# Altium PCB lononTV.PcbDoc
Units mm, origin at the board's own origin, x right, y up, seen from the top; angles counter-clockwise.
Board outline 59.36 x 60.2 mm, 2 copper layers (Top Layer, Bottom Layer); 61 components, 57 nets, 268 pads, 237 vias.
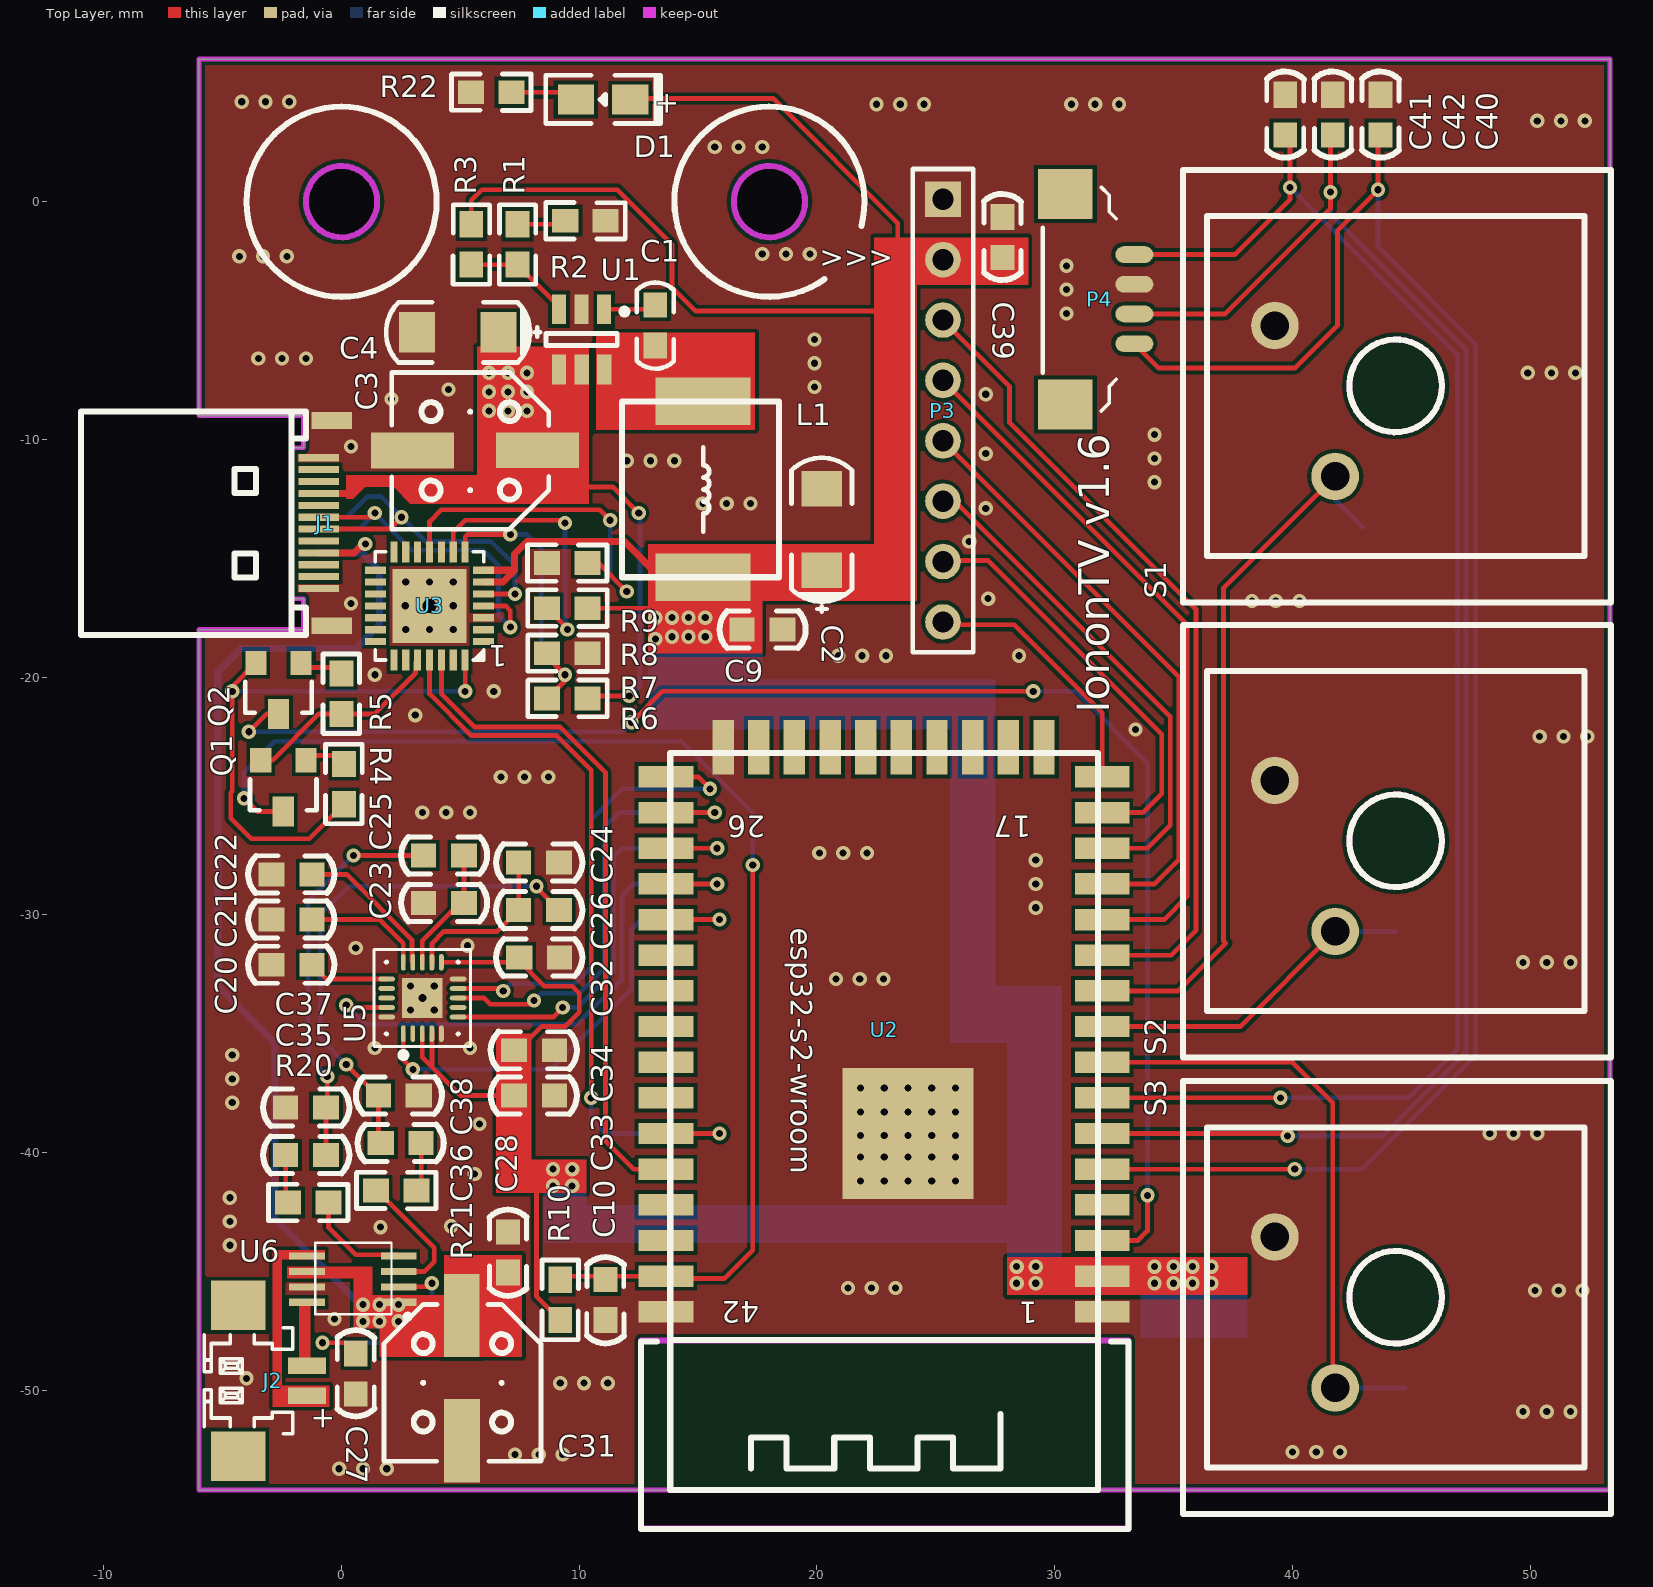
[diagram p0: Top Layer view]
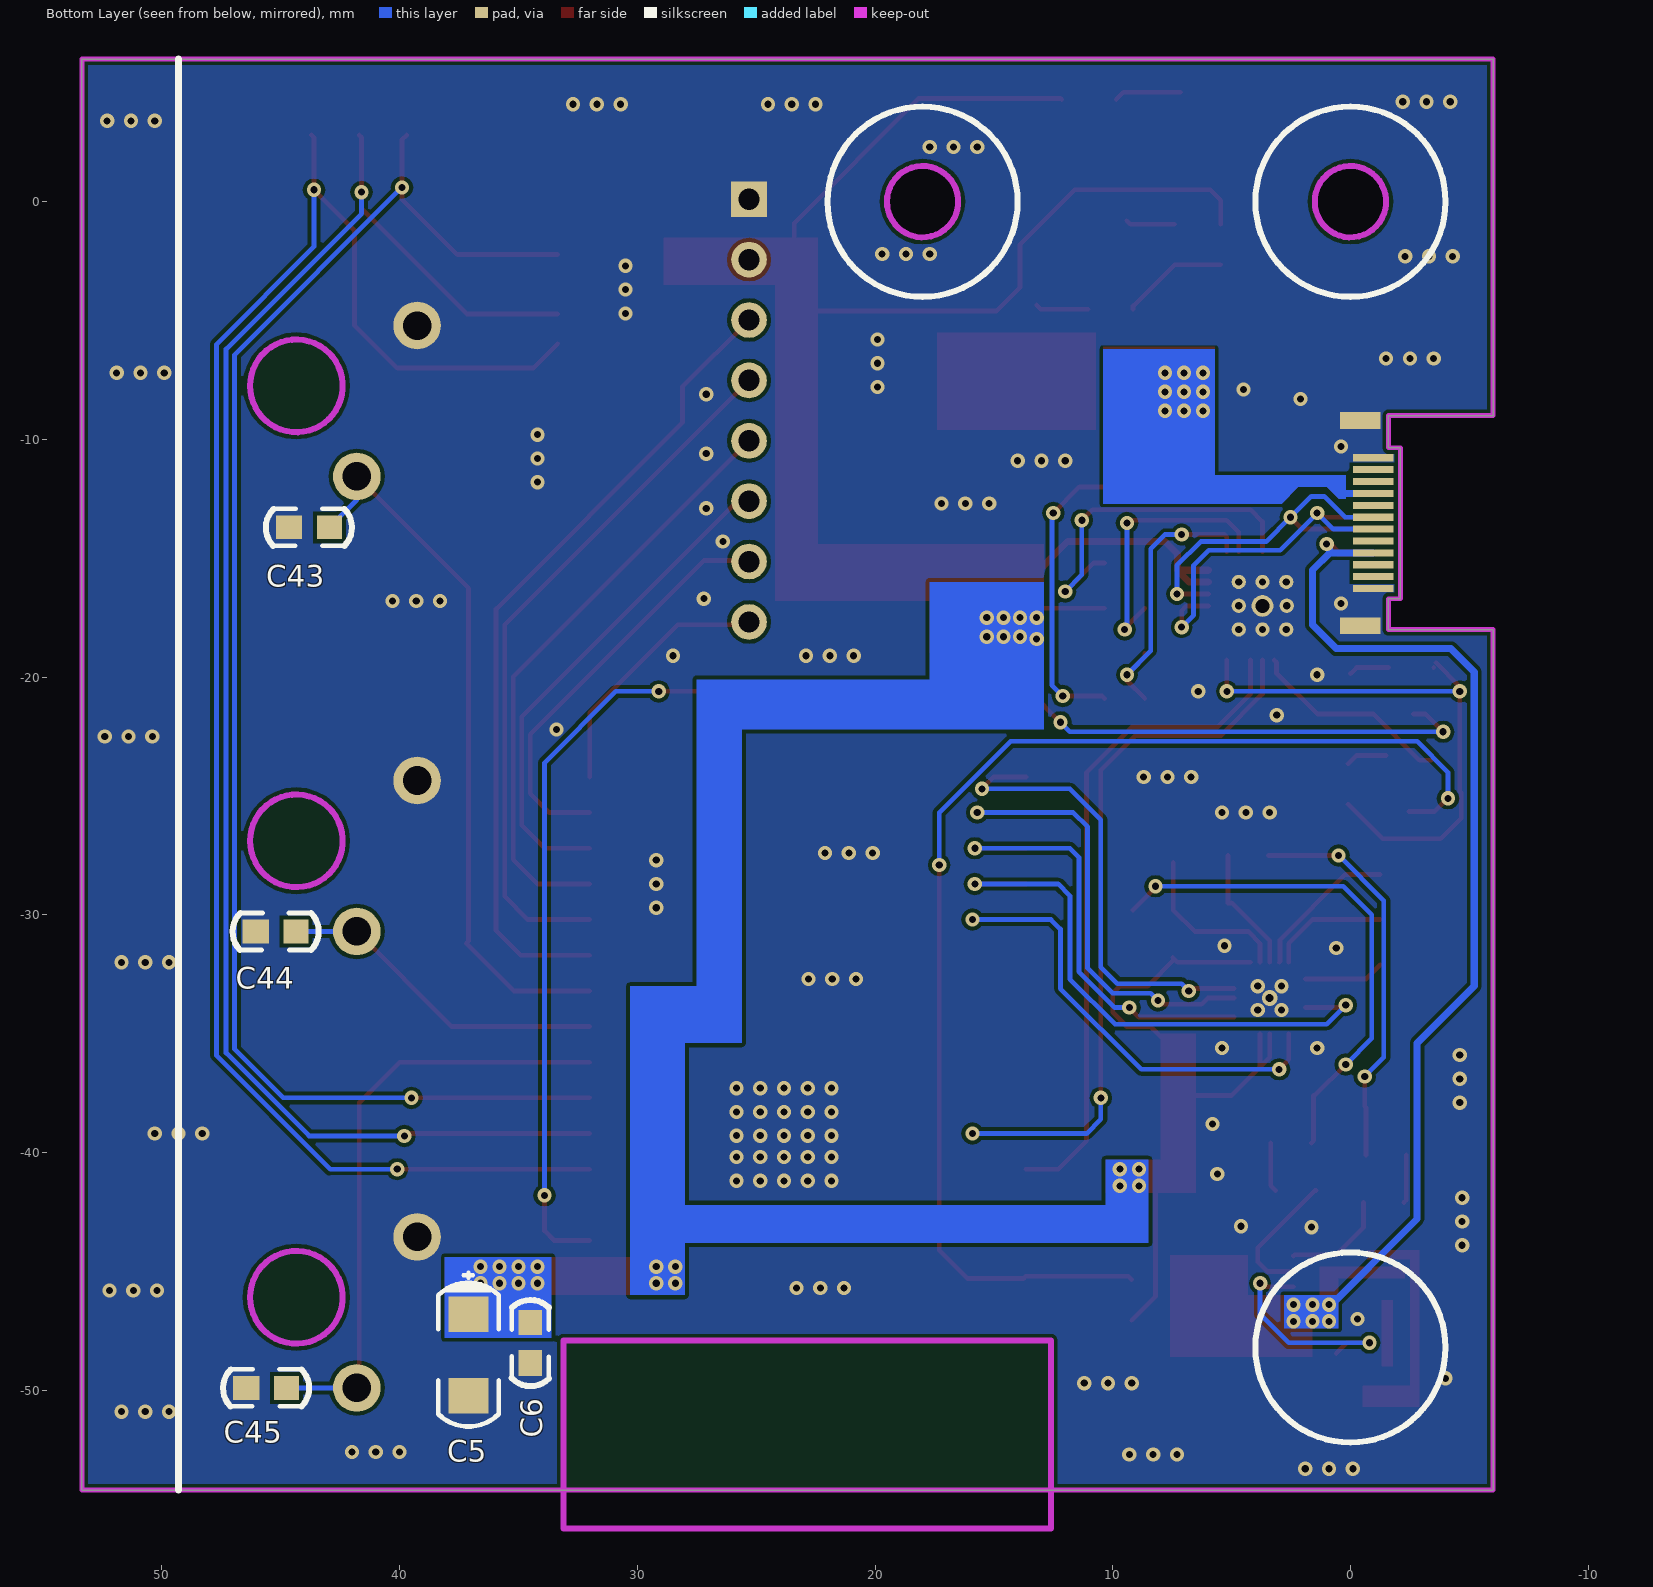
[diagram p1: Bottom Layer view, seen from below]

## Layer stack, top to bottom
Top Layer: signal copper 0.0356
Dielectric: dielectric 0.32, FR-4, Dk 4.8
Bottom Layer: signal copper 0.0356

## Board outline
-6,-35.6 -6,-18 -1.6,-18 -1.6,-16.7 -2.1,-16.7 -2.1,-10.35 -1.6,-10.35 -1.6,-9 -6,-9 -6,6 53.36,6 53.36,-54.2 -6,-54.2
cut-out: 16.5,0 ccw(c18,0) 18,-1.5 ccw(c18,0) 19.5,0 ccw(c18,0) 18,1.5 ccw(c18,0)
cut-out: 0,-1.5 cw(c0,0) -1.5,0 cw(c0,0) 0,1.5 cw(c0,0) 1.5,0 cw(c0,0)

## Design rules (kind name [scope] priority, off if disabled: settings)
Clearance [All] p1: gap=0.16
ComponentClearance [All] p1 off: gap=0.254 collisioncheckmode=3 verticalgap=0.254 showdistances=FALSE
PolygonConnect [All] p1: connectstyle=Direct reliefconductorwidth=0.254 reliefentries=4 polygonreliefangle="90 Angle"
RoutingVias [All] p1: holewidth=0.3 width=0.6 viastyle="Through Hole" minholewidth=0.3 minwidth=0.6 maxholewidth=0.3 maxwidth=0.6
SilkscreenOverComponentPads [All] p1: minsilkscreentomaskgap=0.254
SolderMaskExpansion [All] p1: expansion=0.102
Width [All] p1: maxlimit=0.3 minlimit=0.2 preferedwidth=0.2
26 further rules are at their usual default settings.

## Components (designator, comment, footprint, x,y, rotation, side; value= is the part's Value field where it differs from the comment)
C1 "100nF" 0603C 13.2,-5.2 r270 top
C2 "10uF" 1206-A 20.2,-15.5 r90 top
C3 "220uF" 铝电容6.6 5.6,-10.5 r0 top
C4 "10uF" 1206-A 6.6,-5.5 r180 top
C5 "10uF/16v" 1206-A 37.1,-46.8 r270 bottom
C6 "104" "C0603 - duplicate" 34.5,-48 r270 bottom
C9 "104" "C0603 - duplicate" 17.7,-18 r0 top
C10 "105" "C0603 - duplicate" 11.1,-46.2 r270 top
C20 "105" "C0603 - duplicate" -2.1,-32.1 r180 top
C21 "105" "C0603 - duplicate" -2.1,-30.2 r180 top
C22 "105" "C0603 - duplicate" -2.1,-28.3 r180 top
C23 "22p" "C0603 - duplicate" 4.3,-29.5 r0 top
C24 "22p" "C0603 - duplicate" 8.3,-27.8 r0 top
C25 "105" "C0603 - duplicate" 4.3,-27.5 r0 top
C26 "105" "C0603 - duplicate" 8.3,-29.8 r0 top
C27 "105" "C0603 - duplicate" 0.6,-49.3 r90 top
C28 "104" "C0603 - duplicate" 7,-44.2 r270 top
C31 "220uF" 铝电容6.6 5.1,-49.5 r90 top
C32 "105" "C0603 - duplicate" 8.328,-31.8 r180 top
C33 "104" "C0603 - duplicate" 8.1,-37.6 r180 top
C34 "104" "C0603 - duplicate" 8.1,-35.7 r180 top
C35 "104" "C0603 - duplicate" -1.5,-40.1 r0 top
C36 "104" "C0603 - duplicate" 2.5,-39.6 r180 top
C37 "22p" "C0603 - duplicate" -1.5,-38.1 r0 top
C38 "22p" "C0603 - duplicate" 2.4,-37.6 r0 top
C39 "104" "C0603 - duplicate" 27.8,-1.5 r90 top
C40 "104" "C0603 - duplicate" 43.7,3.65 r90 top
C41 "104" "C0603 - duplicate" 39.7,3.65 r90 top
C42 "104" "C0603 - duplicate" 41.7,3.65 r90 top
C43 "104" "C0603 - duplicate" 43.8,-13.7 r0 bottom
C44 "104" "C0603 - duplicate" 45.2,-30.7 r0 bottom
C45 "104" "C0603 - duplicate" 45.6,-49.9 r0 bottom
D1 "" d0805 11,4.3 r180 top
J1 "" TYPE-C夹板C2856664 -0.4,-9.2 r270 top
J2 "SPK" "MX1.25-2P 立" -2.9,-49.6 r90 top
L1 "6.8uH" 电感7.4*6.6 18.4,-8.4 r270 top
P3 "Header 8" HDR1X8 25.3,0.1 r270 top
P4 "Header 4" "MX1.25-4P 立" 30.2,-12.4 r90 top
Q1 "8050" 3904 -1.5,-23.5 r180 top
Q2 "8050" 3904 -1.7,-19.4 r180 top
R1 "10k" 0603R 7.4,-1.799 r270 top
R2 "1.3k" 0603R 10.26,-0.8 r180 top
R3 "51k" 0603R 5.46,-1.8 r270 top
R4 "10K" R0603 0.1,-24.5 r90 top
R5 "10K" R0603 -0.006,-20.701 r90 top
R6 "22.1K" R0603 9.5,-20.9 r0 top
R7 "47.5K" R0603 9.5,-19 r0 top
R8 "2K" R0603 9.5,-17.1 r0 top
R9 "10K" R0603 9.5,-15.2 r180 top
R10 "10K" 0603R 9.2,-46.2 r90 top
R20 "150K" 0603R -1.4,-42.1 r180 top
R21 "150K" 0603R 2.3,-41.6 r0 top
R22 "330R" 0603R 6.3,4.6 r0 top
S1 "6X6X6mm" C400237_KT红轴 36.4,-14.86 r90 top
S2 "6X6X6mm" C400237_KT红轴 36.4,-34 r90 top
S3 "6X6X6mm" C400237_KT红轴 36.4,-53.2 r90 top
U1 "STI3470" SOT-23-6L 10.1,-5.8 r270 top
U2 "esp32-s2-wroom" ESP32-S2-WROOM 31.9,-46.7 r180 top
U3 "CP2102N" "QFN 28-pin-05P" 3.7,-17 r90 top
U5 "ES8311" QFN20_3*3 2.6,-35 r90 top
U6 "NS4150" MSOP8 2.4,-46.3 r180 top

## Footprints (in the part's own frame and the unit in brackets; to place one, negate y for a bottom-side part, rotate by r counter-clockwise, add the part's x,y. Pads: shape width x height; smd on the part's side, far side on the other; paste and mask are expansions set on the pad)
0603C [mm]
  rect 1.05x1 smd: 1(-0.85,0)
  rect 1.1x1 smd: 2(0.85,0)
  silkscreen extent -1.8,-0.78 1.83,0.78
0603R [mm]
  rect 1.1x1 smd: 1(-0.85,0) 2(0.85,0)
  silkscreen extent -1.67,-0.77 1.67,0.77
1206-A [mm]
  rect 1.5x1.7 smd: 1(0,0) 2(3.429,0)
  silkscreen extent -1.76,-1.27 4.72,1.27
3904 [mm]
  rect 0.889x1.016 smd: 1(0,0) 3(1.9,0)
  rect 0.9x1.27 smd: 2(0.95,2.15)
  silkscreen extent -0.45,0.8 2.35,2.1
"C0603 - duplicate" [mm]
  rect 1.05x1 smd: 1(-0.85,0)
  rect 1.1x1 smd: 2(0.85,0)
  silkscreen extent -1.8,-0.78 1.83,0.78
C400237_KT红轴 [mm]
  round 2 hole 1.2: 1(3.3,-5.4) 2(9.65,-2.86)
  Keep-Out Layer circle w0.254: c7.11,-7.94 r1.95
  silkscreen extent -2,-17 16.2,1
d0805 [mil]
  rect 60x50 smd: A(-45,0) K(45,0)
  silkscreen extent -95,-40 95,40
ESP32-S2-WROOM [mm]
  rect 2.3x0.9 smd: 1(-0.1,0) 2(-0.1,-1.5) 3(-0.1,-3) 4(-0.1,-4.5) 5(-0.1,-6) 6(-0.1,-7.5) 7(-0.1,-9) 8(-0.1,-10.5) 9(-0.1,-12) 10(-0.1,-13.5) 11(-0.1,-15) 12(-0.1,-16.5) 13(-0.1,-18) 14(-0.1,-19.5) 15(-0.1,-21) 16(-0.1,-22.5) 27(18.25,-22.5) 28(18.25,-21) 29(18.25,-19.5) 30(18.25,-18) 31(18.25,-16.5) 32(18.25,-15) 33(18.25,-13.5) 34(18.25,-12) 35(18.25,-10.5) 36(18.25,-9) 37(18.25,-7.5) 38(18.25,-6) 39(18.25,-4.5) 40(18.25,-3) 41(18.25,-1.5) 42(18.25,0)
  rect 0.9x2.3 smd: 17(2.35,-23.75) 18(3.85,-23.75) 19(5.35,-23.75) 20(6.85,-23.75) 21(8.35,-23.75) 22(9.85,-23.75) 23(11.35,-23.75) 24(12.85,-23.75) 25(14.35,-23.75) 26(15.85,-23.75)
  rect 5.5x5.5 smd: 43(8.073,-7.5)
  Keep-Out Layer lines w0.254: 19.3,9.11 19.3,1.21 -1.2,1.21 -1.2,9.11 19.3,9.11
  silkscreen extent -1.2,-23.51 19.3,9.14
HDR1X8 [mm] "Connector; Header; 8 Position"
  rect 1.5x1.5 hole 0.9: 1(0,0)
  round 1.5 hole 0.9: 2(2.54,0) 3(5.08,0) 4(7.62,0) 5(10.16,0) 6(12.7,0) 7(15.24,0) 8(17.78,0)
  silkscreen extent -1.27,-1.27 19.05,1.27
MSOP8 [mm]
  rect 1.5x0.3 smd: 1(0,0) 2(0,-0.65) 3(0,-1.3) 4(0,-1.95) 5(3.85,-1.95) 6(3.85,-1.3) 7(3.85,-0.65) 8(3.85,0)
  silkscreen extent -0.46,-2.5 3.5,0.68
"MX1.25-2P 立" [mm]
  rect 2.1x2.3 smd: 0(-3.175,1.45) 0(3.175,1.45)
  rect 0.7x1.6 smd: 1(-0.625,-1.45) 2(0.625,-1.45)
  silkscreen extent -2.23,-0.84 2.23,2.88
"MX1.25-4P 立" [mm]
  rect 2.1x2.3 smd: 0(3.875,-0.25) 0(12.725,-0.25)
  oval 0.7x1.6 smd: 1(10.175,-3.15) 2(8.925,-3.15) 3(7.675,-3.15) 4(6.425,-3.15)
  silkscreen extent 3.59,-2.39 13.01,0.7
QFN20_3*3 [mm]
  oval 0.7x0.2 smd: 1(0,0) 2(0,-0.4) 3(0,-0.8) 4(0,-1.2) 5(0,-1.6) 11(3,-1.6) 12(3,-1.2) 13(3,-0.8) 14(3,-0.4) 15(3,0)
  oval 0.2x0.7 smd: 6(0.7,-2.3) 7(1.1,-2.3) 8(1.5,-2.3) 9(1.9,-2.3) 10(2.3,-2.3) 16(2.3,0.7) 17(1.9,0.7) 18(1.5,0.7) 19(1.1,0.7) 20(0.7,0.7)
  rect 1.7x1.7 smd: 21(1.5,-0.8)
  silkscreen extent -1.02,-2.83 3.53,1.23
"QFN 28-pin-05P" [mm]
  rect 0.3x0.88 smd: 1(-1.506,-2.276) 2(-1.006,-2.276) 3(-0.506,-2.276) 4(-0.006,-2.276) 5(0.494,-2.276) 6(0.994,-2.276) 7(1.494,-2.276) 15(1.494,2.274) 16(0.994,2.274) 17(0.494,2.274) 18(-0.006,2.274) 19(-0.506,2.274) 20(-1.006,2.274) 21(-1.506,2.274)
  rect 0.88x0.3 smd: 8(2.269,-1.501) 9(2.269,-1.001) 10(2.269,-0.501) 11(2.269,-0.001) 12(2.269,0.499) 13(2.269,0.999) 14(2.269,1.499) 22(-2.281,1.499) 23(-2.281,0.999) 24(-2.281,0.499) 25(-2.281,-0.001) 26(-2.281,-0.501) 27(-2.281,-1.001) 28(-2.281,-1.501)
  round 0.6 hole 0.3: 29(-0.996,-0.998) 29(-0.996,0.002) 29(-0.996,1.002) 29(0.004,1.018) 29(0.004,-0.998) 29(1.004,-0.998) 29(1.004,0.002) 29(1.004,1.002)
  round 0.914 hole 0.6: 29(-0.006,-0.001)
  rect 3.1x3.1 smd: 29(-0.006,-0.001)
  silkscreen extent -2.28,-2.28 2.27,2.27
R0603 [mm]
  rect 1.1x1 smd: 1(-0.85,0) 2(0.85,0)
  silkscreen extent -1.67,-0.77 1.67,0.77
SOT-23-6L [mm] "SOT23, 6-Leads, Body 3.0x2.9mm (max), Pitch 0.95mm, IPC Medium Density"
  rect 1.25x0.6 smd: 1(-1.272,0.945) 2(-1.272,-0.005) 3(-1.272,-0.955) 4(1.265,-0.95) 5(1.265,0) 6(1.265,0.95)
  silkscreen extent -1.3,-1.5 0.25,1.93
TYPE-C夹板C2856664 [mm]
  rect 0.7x1.7 smd: 25(0.004,-0.009) 25(8.644,-0.009)
  rect 0.7x1.7 smd far side: 26(0.004,-0.009) 26(8.644,-0.009)
  rect 0.3x1.7 smd: A1(1.574,-0.559) A2(2.074,-0.559) A3(2.574,-0.559) A4(3.074,-0.559) A5(3.574,-0.559) A6(4.074,-0.559) A7(4.574,-0.559) A8(5.074,-0.559) A9(5.574,-0.559) A10(6.074,-0.559) A11(6.574,-0.559) A12(7.074,-0.559)
  rect 0.3x1.7 smd far side: B1(7.074,-0.559) B2(6.574,-0.559) B3(6.074,-0.559) B4(5.574,-0.559) B5(5.074,-0.559) B6(4.574,-0.559) B7(4.074,-0.559) B8(3.574,-0.559) B9(3.074,-0.559) B10(2.574,-0.559) B11(2.074,-0.559) B12(1.574,-0.559)
  silkscreen extent -0.38,-10.56 9.02,-1.09
电感7.4*6.6 [mm]
  rect 2x4 smd: 1(0,-3.2) 2(7.4,-3.2)
  silkscreen extent 0,-6.6 7.4,0
铝电容6.6 [mm]
  rect 3.5x1.5 smd: 1(2.64,0.04) 2(-2.62,0.03)
  silkscreen extent -3.49,-3.29 3.11,3.31

## Part data
C1: library part CAP, "贴片电容"
C2 C3 C4: library part CAPACITOR, "钽电容"
C5 C31: library part CAPACITOR, "Capacitor"
C6 C9 C10 C20 C21 C22 C23 C24 C25 C26 C27 C28 C32 C33 C34 C35 C36 C37 C38 C39 C40 C41 C42 C43 C44 C45: library part CAP, "Capacitor"
D1: library part LED
J1: library part TYPE-C夹板C2856664
J2: library part CON2
L1: library part Inductor, "Inductor"
P3: "Header, 8-Pin"
P4: "Header, 4-Pin"
Q1 Q2: library part NPN, "NPN Transistor"
R1 R2 R3 R4 R5 R6 R7 R8 R9 R10 R20 R21 R22: library part RES1
S1 S2 S3: library part SW-PB, "Switch"
U1: library part RT7285/A

## Via types
v1: diameter 0.6, hole 0.3, Top Layer to Bottom Layer, tented both sides, 236 vias
v2: diameter 0.66, hole 0.33, Top Layer to Bottom Layer, tented both sides, 1 vias

## Nets (pads, with @x,y where several pads share a name; then routed paths per layer and width w, separated by ;. In a path a pad name is that pad's centre, name@x,y a point inside that pad or via, vN(x,y) a via of type N, cw(c..) or ccw(c..) an arc to the next point about the centre after c; other vN are vias at no path point)
BUTTON_1: C43.1 S1.1 U2.10 | length 30.3
  Top Layer w0.2: U2.10 35.2,-33.2 37.2,-31.2 37.1,-31.1 37.1,-16.26 S1.1
  Bottom Layer w0.2: S1.1 41.8,-12.55 C43.1
BUTTON_2: C44.1 S2.1 U2.9 | length 14
  Top Layer w0.2: U2.9 37.8,-34.7 S2.1
  Bottom Layer w0.2: S2.1 C44.1
BUTTON_3: C45.1 S3.1 U2.8 | length 25.4
  Top Layer w0.2: U2.8 40,-36.2 41.7,-37.9 41.7,-49.8 S3.1
  Bottom Layer w0.2: S3.1 C45.1
CTS: U3.23
DCD: U3.1
DECODER_A: C40.1 P4.4 U2.5 | length 74.3
  Top Layer w0.2: U2.5 v1(40.1,-40.7) ; P4.4 34.375,-7 40.1,-7 41.9,-5.2 41.9,-1.2 v1(43.6,0.5) 43.6,2.7 C40.1
  Bottom Layer w0.2: v1(40.1,-40.7) 42.918,-40.7 47.7,-35.918 47.7,-6 43.6,-1.9 v1(43.6,0.5)
DECODER_B: C41.1 P4.1 U2.7 | length 65.3
  Top Layer w0.2: U2.7 v1(39.5,-37.7) ; P4.1 37.575,-2.225 39.9,0.1 39.9,0.4 39.8,0.5 v1(39.9,0.6) 39.9,2.6 C41.1
  Bottom Layer w0.2: v1(39.5,-37.7) 44.9,-37.7 46.94,-35.66 46.94,-6.44 v1(39.9,0.6)
DECODER_SW: C42.1 P4.3 U2.6 | length 68.6
  Top Layer w0.2: U2.6 39.7,-39.2 v1(39.8,-39.3) ; P4.3 37.175,-4.725 41.6,-0.3 v1(41.6,0.4) 41.6,2.7 C42.1
  Bottom Layer w0.2: v1(39.8,-39.3) 43.809,-39.3 47.3,-35.809 47.3,-6.2 41.6,-0.5 v1(41.6,0.4)
DN: J1.A7 J1.B7 U3.5 | length 16
  Top Layer w0.2: J1.A7 2.026,-13.774 v1(2.526,-13.274) ; U3.5 v1@7.3,-16.506
  Bottom Layer w0.2: J1.B7 0.226,-13.274 1.1,-12.4 1.652,-12.4 v1(2.526,-13.274) 3.552,-14.3 6.3,-14.3 7.3,-15.3 v1(7.3,-16.5)
DP: J1.A6 J1.B6 U3.4 | length 15.7
  Top Layer w0.2: J1.A6 v1@1.226,-13.274 ; U3.4@5.982,-17 U3.4 6.906,-17.006 7.1,-17.2 v1(7.1,-17.9)
  Bottom Layer w0.2: J1.B6 0.726,-13.774 v1(1.4,-13.1) 2.96,-14.66 5.96,-14.66 6.6,-15.3 6.6,-17.4 v1(7.1,-17.9)
DSR: U3.27
DTR: Q2.3 R4.1 U3.28 | length 23.8
  Top Layer w0.2: Q2.3 -4.6,-20.4 v1(-4.6,-20.6) -4.6,-24.808 -4.66,-24.868 -4.66,-25.94 -3.8,-26.8 -1.35,-26.8 R4.1 ; v1@5.201,-20.599 U3.28
  Bottom Layer w0.2: v1(-4.6,-20.6) v1(5.2,-20.6)
ES_N: C25.1 C35.2 C37.2 | length 16.7
  Top Layer w0.2: C35.2 C37.2 -0.6,-38.05 v1(-0.6,-36.8) ; v1(0.5,-27.5) C25.1
  Bottom Layer w0.2: v1(-0.6,-36.8) -1.4,-36 -1.4,-29.4 v1(0.5,-27.5)
ES_P: C26.2 C36.2 C38.1 | length 21.7
  Top Layer w0.2: v1(0.2,-36.3) 1.5,-37.6 C38.1 1.55,-39.5 C36.2 ; v1(8.2,-28.8) 8.2,-28.85 C26.2
  Bottom Layer w0.2: v1(0.2,-36.3) -0.9,-35.2 -0.9,-30 0.3,-28.8 v1(8.2,-28.8)
ESP32_RESET: C10.1 Q1.2 R10.2 U2.41 | length 53.3
  Top Layer w0.2: v1(-4.1,-25.1) -3.55,-25.65 Q1.2 ; R10.2 9.35,-45.2 U2.41 13.75,-45.3 16.1,-45.3 17.3,-44.1 v1(17.3,-27.9)
  Bottom Layer w0.2: v1(-4.1,-25.1) -4.1,-24 -2.8,-22.7 14.3,-22.7 17.3,-25.7 v1(17.3,-27.9)
GND: C2.2 C3.2 C4.2 C5.2 C6.2 C9.2 C10.2 C20.2 C21.2 C22.2 C23.1 C24.2 C27.1 C28.1 C31.2 C32.1 C33.1 C34.1 C37.1 C38.2 C39.2 C40.2 C41.2 C42.2 C43.2 C44.2 C45.2 J1.25 J1.26 J1.A1 J1.A12 J1.B1 J1.B12 P3.1 P4.2 R2.1 R7.2 R9.2 R22.1 S1.2 S2.2 S3.2 U1.2 U2.1 U2.26 U2.42 U2.43 U3.3 U3.29 U5.5 U5.10 U5.20 U5.21 U6.7
  other v1: -0.1,-53.3 0.9,-53.3 1.9,-53.3 7.3,-52.7 8.3,-52.7 9.3,-52.7 40,-52.6 41,-52.6 42,-52.6 49.7,-50.9 50.7,-50.9 51.7,-50.9 9.2,-49.7 10.2,-49.7 11.2,-49.7 -4,-49.5 -0.3,-47 50.2,-45.8 51.2,-45.8 52.2,-45.8 21.3,-45.7 22.3,-45.7 23.3,-45.7 -4.7,-43.9 1.639,-43.139 4.6,-43.1 -4.7,-42.9 -4.7,-41.9 21.827,-41.19 22.827,-41.19 23.827,-41.19 24.827,-41.19 25.827,-41.19 5.6,-40.9 21.827,-40.19 22.827,-40.19 23.827,-40.19 24.827,-40.19 25.827,-40.19 21.827,-39.29 22.827,-39.29 23.827,-39.29 24.827,-39.29 25.827,-39.29 48.3,-39.2 49.3,-39.2 50.3,-39.2 5.8,-38.8 21.827,-38.29 22.827,-38.29 23.827,-38.29 24.827,-38.29 25.827,-38.29 -4.6,-37.9 21.827,-37.29 22.827,-37.29 23.827,-37.29 24.827,-37.29 25.827,-37.29 -4.6,-36.9 -4.6,-35.9 1.4,-35.6 5.4,-35.6 2.9,-34 3.9,-34 2.9,-33 3.9,-33 20.8,-32.7 21.8,-32.7 22.8,-32.7 49.7,-32 50.7,-32 51.7,-32 0.6,-31.4 5.3,-31.3 29.2,-29.7 29.2,-28.7 29.2,-27.7 20.1,-27.4 21.1,-27.4 22.1,-27.4 3.4,-25.7 4.4,-25.7 5.4,-25.7 6.7,-24.2 7.7,-24.2 8.7,-24.2 50.4,-22.5 51.4,-22.5 52.4,-22.5 33.4,-22.2 3.1,-21.6 6.4,-20.6 1.4,-19.9 20.9,-19.1 21.9,-19.1 22.9,-19.1 28.5,-19.1 0.4,-16.9 38.3,-16.8 39.3,-16.8 40.3,-16.8 27.2,-16.7 26.4,-14.3 27.1,-12.9 15.2,-12.7 16.2,-12.7 17.2,-12.7 34.2,-11.8 12,-10.9 13,-10.9 14,-10.9 34.2,-10.8 27.1,-10.6 0.4,-10.3 34.2,-9.8 2.1,-8.3 27.1,-8.1 4.5,-7.9 19.9,-7.8 49.9,-7.2 50.9,-7.2 51.9,-7.2 19.9,-6.8 -3.5,-6.6 -2.5,-6.6 -1.5,-6.6 19.9,-5.8 30.5,-4.7 30.5,-3.7 30.5,-2.7 -4.3,-2.3 -3.3,-2.3 -2.3,-2.3 17.7,-2.2 18.7,-2.2 19.7,-2.2 15.7,2.3 16.7,2.3 17.7,2.3 50.3,3.4 51.3,3.4 52.3,3.4 22.5,4.1 23.5,4.1 24.5,4.1 30.7,4.1 31.7,4.1 32.7,4.1 -4.2,4.2 -3.2,4.2 -2.2,4.2
  other v2: 3.4,-33.5
GPIO0: Q2.2 U2.3 | length 63.1
  Top Layer w0.2: v1(-3.9,-22.3) -3.15,-21.55 Q2.2 ; v1(12.2,-21.9) 13.5,-20.6 v1(29.1,-20.6) ; U2.3 33.5,-43.7 33.9,-43.3 v1(33.9,-41.8)
  Bottom Layer w0.2: v1(-3.9,-22.3) 11.8,-22.3 v1(12.2,-21.9) ; v1(29.1,-20.6) 30.9,-20.6 33.9,-23.6 v1(33.9,-41.8)
I2C_SCL: U2.31 U5.1 | length 20.9
  Top Layer w0.2: U5.1 2.6,-36.1 v1(3,-36.5) ; U2.31 v1(15.9,-30.2)
  Bottom Layer w0.2: v1(3,-36.5) 8.8,-36.5 12.2,-33.1 12.2,-30.6 12.6,-30.2 v1(15.9,-30.2)
I2C_SDA: U2.30 U5.19 | length 24.3
  Top Layer w0.2: v1(0.2,-33.8) 0.3,-33.9 U5.19 ; U2.30 v1(15.8,-28.7)
  Bottom Layer w0.2: v1(0.2,-33.8) 1,-34.6 9.9,-34.6 11.8,-32.7 11.8,-29.2 12.3,-28.7 v1(15.8,-28.7)
I2S_BCLK: U2.29 U5.6 | length 18.9
  Top Layer w0.2: U5.6 8.9,-34.3 v1(9.3,-33.9) ; U2.29 v1(15.8,-27.2)
  Bottom Layer w0.2: v1(9.3,-33.9) v1@9.4,-33.8 ; v1@9.4,-33.8 9.5,-33.9 9.918,-33.9 11.42,-32.398 11.42,-27.58 11.8,-27.2 v1(15.8,-27.2)
I2S_LRCK: U2.28 U5.8 | length 19.8
  Top Layer w0.2: U5.8 6,-33.5 6.26,-33.76 7.94,-33.76 v1(8.1,-33.6) ; U2.28 v1(15.7,-25.7)
  Bottom Layer w0.2: v1(8.1,-33.6) 8.4,-33.3 10.009,-33.3 11.06,-32.249 11.06,-26.3 11.66,-25.7 v1(15.7,-25.7)
I2S_SDO: U2.27 U5.9 | length 19.9
  Top Layer w0.2: U5.9 6.7,-33.1 v1(6.8,-33.2) ; U2.27 15,-24.2 v1(15.5,-24.7)
  Bottom Layer w0.2: v1(6.8,-33.2) 7.1,-32.9 9.8,-32.9 10.5,-32.2 10.5,-26 11.8,-24.7 v1(15.5,-24.7)
NetC1_1: C1.1 U1.1 | length 2.2
  Top Layer w0.2: U1.1 13.022,-4.528 C1.1
NetC1_2: C1.2 L1.1 U1.6
NetC20_1: C20.1 U5.16 | length 3.4
  Top Layer w0.2: C20.1 -0.65,-32.7 U5.16
NetC21_1: C21.1 U5.15 | length 5.1
  Top Layer w0.2: C21.1 1.6,-30.2 2.6,-31.2 U5.15
NetC22_1: C22.1 U5.14 | length 6.3
  Top Layer w0.2: C22.1 0.209,-28.3 2.96,-31.051 2.96,-31.96 U5.14
NetC23_2: C23.2 C25.2 U5.13 | length 5.3
  Top Layer w0.2: U5.13 3.4,-31.1 5,-29.5 C23.2 C25.2
NetC24_1: C24.1 C26.1 U5.12 | length 7
  Top Layer w0.2: U5.12 3.8,-31.209 4.309,-30.7 6.55,-30.7 C26.1 C24.1
NetC27_2: C27.2 U6.2 | length 9.4
  Top Layer w0.2: v1(-0.8,-48) 0.15,-48 C27.2 ; U6.2 3.55,-45.65 3.7,-45.5 v1(3.8,-45.5)
  Bottom Layer w0.2: v1(-0.8,-48) 2.6,-48 3.8,-46.8 v1(3.8,-45.5)
NetC35_1: C35.1 R20.2 | length 2
  Top Layer w0.2: C35.1 -2.35,-42 R20.2
NetC36_1: C36.1 R21.2 | length 2.1
  Top Layer w0.2: R21.2 3.35,-41.4 C36.1
NetD1_K: D1.K R22.2 | length 2.8
  Top Layer w0.2: R22.2 9.557,4.6 D1.K
NetQ1_1: Q1.1 R4.2 | length 1.7
  Top Layer w0.2: Q1.1@-1.5,-23.3 -0.25,-23.3 R4.2
NetQ2_1: Q2.1 R5.2 | length 1.7
  Top Layer w0.2: Q2.1@-1.6,-19.6 -0.257,-19.6 R5.2
NetR1_1: R1.1 R2.2 | length 2.1
  Top Layer w0.2: R1.1 9.261,-0.949 R2.2
NetR1_2: R1.2 R3.2 U1.3 | length 4.5
  Top Layer w0.2: R3.2@5.461,-2.649 R1.2 9.145,-4.394 U1.3
NetR6_1: R6.1 R7.1 U3.8 | length 12.4
  Top Layer w0.2: U3.8 5.201,-14.099 5.3,-14 v1(7.1,-14) ; R6.1 9.4,-20.15 v1(9.4,-19.9) 8.65,-19.15 R7.1
  Bottom Layer w0.2: v1(7.1,-14) 7.8,-14 8.4,-14.6 8.4,-18.9 v1(9.4,-19.9)
NetR8_1: R8.1 U3.9 | length 11.6
  Top Layer w0.2: U3.9 4.701,-13.899 5.2,-13.4 9.28,-13.4 v1(9.4,-13.52) ; R8.1 9.5,-17.95 v1(9.5,-18)
  Bottom Layer w0.2: v1(9.4,-13.52) 9.4,-17.9 v1(9.5,-18)
NetR9_1: R9.1 U3.11 | length 14.7
  Top Layer w0.2: U3.11 3.701,-13.459 4.2,-12.96 10.86,-12.96 v1(11.3,-13.4) ; R9.1 10.8,-15.2 v1(12,-16.4)
  Bottom Layer w0.2: v1(11.3,-13.4) 11.3,-15.7 v1(12,-16.4)
PA_INL+: R21.1 U6.3 | length 5.7
  Top Layer w0.2: R21.1 1.5,-41.6 3.9,-44 3.9,-44.6 3.5,-45 U6.3
PA_INL-: R20.1 U6.4 | length 4.5
  Top Layer w0.2: R20.1 -0.55,-43.15 0.6,-44.3 2.35,-44.3 U6.4
PA_OUTL+: J2.2 U6.8
PA_OUTL-: J2.1 U6.5
RI: U3.2
RTS: Q1.3 R5.1 U3.24 | length 8.6
  Top Layer w0.2: Q1.3 -2.9,-23.5 -0.951,-21.551 R5.1 1.389,-21.551 3.111,-19.829 3.111,-19.371 U3.24
SCREEN_CS: P3.7 U2.15 | length 17.6
  Top Layer w0.2: P3.7 25.34,-15.1 27.2,-15.1 34.5,-22.4 34.5,-24.9 33.7,-25.7 U2.15
SCREEN_DC: P3.6 U2.14 | length 21.2
  Top Layer w0.2: P3.6 25.801,-12.6 34.86,-21.659 34.86,-26.24 33.9,-27.2 U2.14
SCREEN_LED: P3.8 U2.16 | length 11
  Top Layer w0.2: P3.8 25.42,-17.8 28.3,-17.8 32,-21.5 U2.16
SCREEN_MOSI: P3.4 U2.12 | length 29.9
  Top Layer w0.2: P3.4 35.58,-17.8 35.58,-29.22 34.6,-30.2 U2.12
SCREEN_RESET: P3.5 U2.13 | length 25.4
  Top Layer w0.2: P3.5 35.22,-19.98 35.22,-27.68 34.2,-28.7 U2.13
SCREEN_SCK: P3.3 U2.11 | length 34.5
  Top Layer w0.2: P3.3 28.1,-7.78 28.1,-9.3 35.94,-17.14 35.94,-30.66 34.9,-31.7 U2.11
U0RXD: U2.38 U3.26 | length 28.2
  Top Layer w0.2: U3.26 4.201,-20.701 5.6,-22.1 9.2,-22.1 11.1,-24 11.1,-39.5 12.3,-40.7 U2.38
U0TXD: U2.37 U3.25 | length 32.1
  Top Layer w0.2: U3.25 3.701,-20.71 5.451,-22.46 9.051,-22.46 10.5,-23.909 v1(10.5,-37.7) ; U2.37 v1(15.9,-39.2)
  Bottom Layer w0.2: v1(10.5,-37.7) 10.5,-38.6 11.1,-39.2 v1(15.9,-39.2)
VCC: C3.1 C4.1 J1.A4 J1.B9 R6.2 U1.4 U1.5 | length 17
  Top Layer w0.2: 9.8,-12 11.4,-12 v1(12.5,-13.1) ; R6.2 10.45,-20.8 v1(12.1,-20.8)
  Top Layer w0.3: J1.A4 0.326,-12.274 ; 8.24,-12.04 C3.1
  Bottom Layer w0.2: v1(12.1,-20.8) 12.56,-20.34 12.56,-13.16 v1(12.5,-13.1)
  Bottom Layer w0.3: J1.B9 0.274,-12.274
  other v1: 6.2,-8.8 7,-8.8 7.8,-8.8 6.2,-8 7,-8 7.8,-8 6.2,-7.2 7,-7.2 7.8,-7.2
VCC33: C2.1 C5.1 C6.1 C9.1 C32.2 C33.2 C34.2 C39.1 D1.A L1.2 P3.2 R3.1 R8.2 R10.1 U2.2 U3.6 U3.7 U5.3 U5.4 U5.11 | length 74.3
  Top Layer w0.2: U5.3 3.4,-36 3.8,-36.4 ; U5.4 3.8,-36.4 ; U5.11 7.278,-32 C32.2@7.403,-31.875 ; R3.1 5.46,0.06 5.9,0.5 11.6,0.5 13.9,-1.8 13.9,-3.6 14.9,-4.6 22.7,-4.6 ; C33.2 5,-37.6 3.8,-36.4 ; C34.2 7.405,-35.7 8.405,-34.7 9.4,-34.7 10,-34.1 10,-33.3 9.7,-33 8.528,-33 C32.2@7.403,-31.875 ; C32.2 C32.2@7.403,-31.875 ; 8.2,-41.4 8.2,-46.05 R10.1 ; R8.2 13.5,-17.1 13.6,-17.2 ; D1.A 12.186,4.343 18.157,4.343 23.4,-0.9 23.4,-2.7
  Top Layer w0.3: U3.6 6.794,-16.006 7.28,-15.52 7.28,-14.82 7.8,-14.3 11.9,-14.3 L1.2@13.4,-15.8 ; U3.7 7.266,-15.506
  other v1: 28.4,-45.5 29.2,-45.5 34.2,-45.5 35,-45.5 35.8,-45.5 36.6,-45.5 28.4,-44.8 29.2,-44.8 34.2,-44.8 35,-44.8 35.8,-44.8 36.6,-44.8 8.9,-41.4 9.7,-41.4 8.9,-40.7 9.7,-40.7 13.2,-18.4 13.9,-18.3 14.6,-18.3 15.3,-18.3 13.2,-17.5 13.9,-17.5 14.6,-17.5 15.3,-17.5
VCC_SP: C28.2 C31.1 J1.A9 J1.B4 U6.1 U6.6 | length 46.1
  Top Layer w0.3: J1.A9 0.526,-14.774 v1@0.95,-14.35
  Bottom Layer w0.3: J1.B4 0.874,-14.774 ; v1(1,-14.4) 0.874,-14.526 0.874,-14.774 ; 2.3,-46.8 1.2,-46.8 -2.8,-42.8 -2.8,-35.4 -5.21,-32.99 -5.21,-19.79 -4.22,-18.8 0.6,-18.8 1.6,-17.8 1.6,-15.5 0.874,-14.774
  other v1: 0.9,-47.1 1.6,-47.1 2.4,-47.1 0.9,-46.4 1.6,-46.4 2.4,-46.4
pads on no net: J1.A2 J1.A3 J1.A5 J1.A8 J1.A10 J1.A11 J1.B2 J1.B3 J1.B5 J1.B8 J1.B10 J1.B11 J2.0 P4.0 U2.4 U2.17 U2.18 U2.19 U2.20 U2.21 U2.22 U2.23 U2.24 U2.25 U2.32 U2.33 U2.34 U2.35 U2.36 U2.39 U2.40 U3.10 U3.12 U3.13 U3.14 U3.15 U3.16 U3.17 U3.18 U3.19 U3.20 U3.21 U3.22 U5.2 U5.7 U5.17 U5.18

## Polygon pours and split planes (outlines as drawn)
GND on Bottom Layer "Top Layer-No Net" (solid, remove dead copper, pour order 1000): -24.84,14.5 -24.14,15.2 70.86,15.2 70.86,-60 78.26,-67.4 76.26,-65.4 -16.24,-65.4
GND on Top Layer "Top Layer-No Net" (solid, remove dead copper, pour order 1001): -26.04,15.7 73.26,15.7 78.56,21 78.46,20.9 78.46,-68.4 -17.84,-68.4 -20.14,-66.1

## Keep-outs
Keep-Out Layer:
  circle w0.254: c18,0 r1.5
  circle w0.254: c0,0 r1.5
  lines w0.2: -6,-54.2 -6,-35.6 -6,-18 -1.6,-18 -1.6,-16.7 -2.1,-16.7 -2.1,-10.35 -1.6,-10.35 -1.6,-9 -6,-9 -6,6 53.36,6 53.36,-54.2 -6,-54.2

## Other copper
Top Layer:
  rectangle net VCC: 5.7,-12.7 10.4,-6.1
  rectangle net NetC1_2: 10.7,-9.6 17.4,-5.5
  rectangle net VCC33: 12.9,-19 17.7,-14.4
  rectangle net VCC33: 12.9,-16.8 24.2,-14.4
  rectangle net VCC33: 22.4,-16.8 24.2,-1.5
  rectangle net VCC33: 22.4,-3.5 28.9,-1.5
  rectangle net VCC33: 28,-46 38.1,-44.4
  rectangle net VCC33: 6.5,-41.7 8,-35
  rectangle net VCC33: 6.5,-41.7 10.3,-40.3
  rectangle net PA_OUTL+: -1.8,-49 -1.3,-46.2
  rectangle net PA_OUTL-: -2.9,-50.7 -2.5,-44.1
  rectangle net PA_OUTL-: -2.9,-44.5 -0.7,-44.1
  rectangle net PA_OUTL-: -2.9,-50.7 -0.5,-49.8
  rectangle net VCC_SP: 1.6,-48.6 5.9,-46
  rectangle net VCC_SP: 4.3,-48.6 7.6,-44.3
  rectangle net VCC_SP: -2.3,-45.3 1.3,-44.8
  rectangle net VCC_SP: 0.5,-47.2 1.3,-44.8
  rectangle net VCC_SP: 0.5,-47.4 4.4,-46
  region net VCC: 0.2,-12.5 0.5,-12.5 1,-12 2.2,-12 2.9,-12.7 10.4,-12.7 10.4,-11.5 0.2,-11.5
Bottom Layer:
  rectangle net VCC33: 33.6,-47.8 38.1,-44.4
  rectangle net VCC: 5.7,-12.7 10.4,-6.2
  rectangle net VCC33: 12.9,-22.2 17.7,-16
  rectangle net VCC33: 15.4,-22.2 27.5,-20.1
  rectangle net VCC33: 25.6,-35.4 27.5,-20.1
  rectangle net VCC33: 25.6,-35.4 30.3,-33
  rectangle net VCC33: 28,-46 30.3,-33
  rectangle net VCC33: 8.5,-43.8 30.3,-42.2
  rectangle net VCC33: 8.5,-43.8 10.3,-40.3
  rectangle net VCC_SP: 0.5,-47.4 2.8,-46
  region net VCC: 0.2,-12.5 0.5,-12.5 1,-12 2.2,-12 2.9,-12.7 10.4,-12.7 10.4,-11.5 0.2,-11.5

## Silkscreen, mask and mechanical layers (free items; w line width, h text height)
Top Overlay:
  circle w0.254: c0,0 r4
  lines w0.254: 20.315,-3.262 cw(c18,0) 21.868,-1.018
  text "<<<" at 23.2,-2 h0.9 r180
  text "lononTV v1.6" at 32.3,-21.5 h1.3 r90
  text "+" at -0.4,-51.7 h0.9 r90
Bottom Overlay:
  circle w0.254: c0,0 r4
  circle w0.254: c18,0 r4
  circle w0.254: c0,-48.2 r4
  lines w0.3: 49.3,-54.2 49.3,6

## Text inside footprints (layer, text, board x,y; h text height)
D1: Top Overlay "+" at 14.081,4.644 h0.9 r90
U2: Top Overlay "42" at 17.577,-46.25 h0.9 r180; Top Overlay "26" at 17.827,-25.84 h0.9 r180; Top Overlay "17" at 29.017,-25.84 h0.9 r180; Top Overlay "1" at 29.287,-46.28 h0.9 r180
U3: Top Overlay "1" at 6.962,-18.662 h0.9 r180